# Altium PCB FT232_USB_8DAQ.PcbDoc (part 2 of 3)
Units mil, origin at the board's own origin, x right, y up, seen from the top; angles counter-clockwise.
Board outline 5020 x 4715 mil, 2 copper layers (Top Layer, Bottom Layer); 100 components, 0 nets, 361 pads, 148 vias.
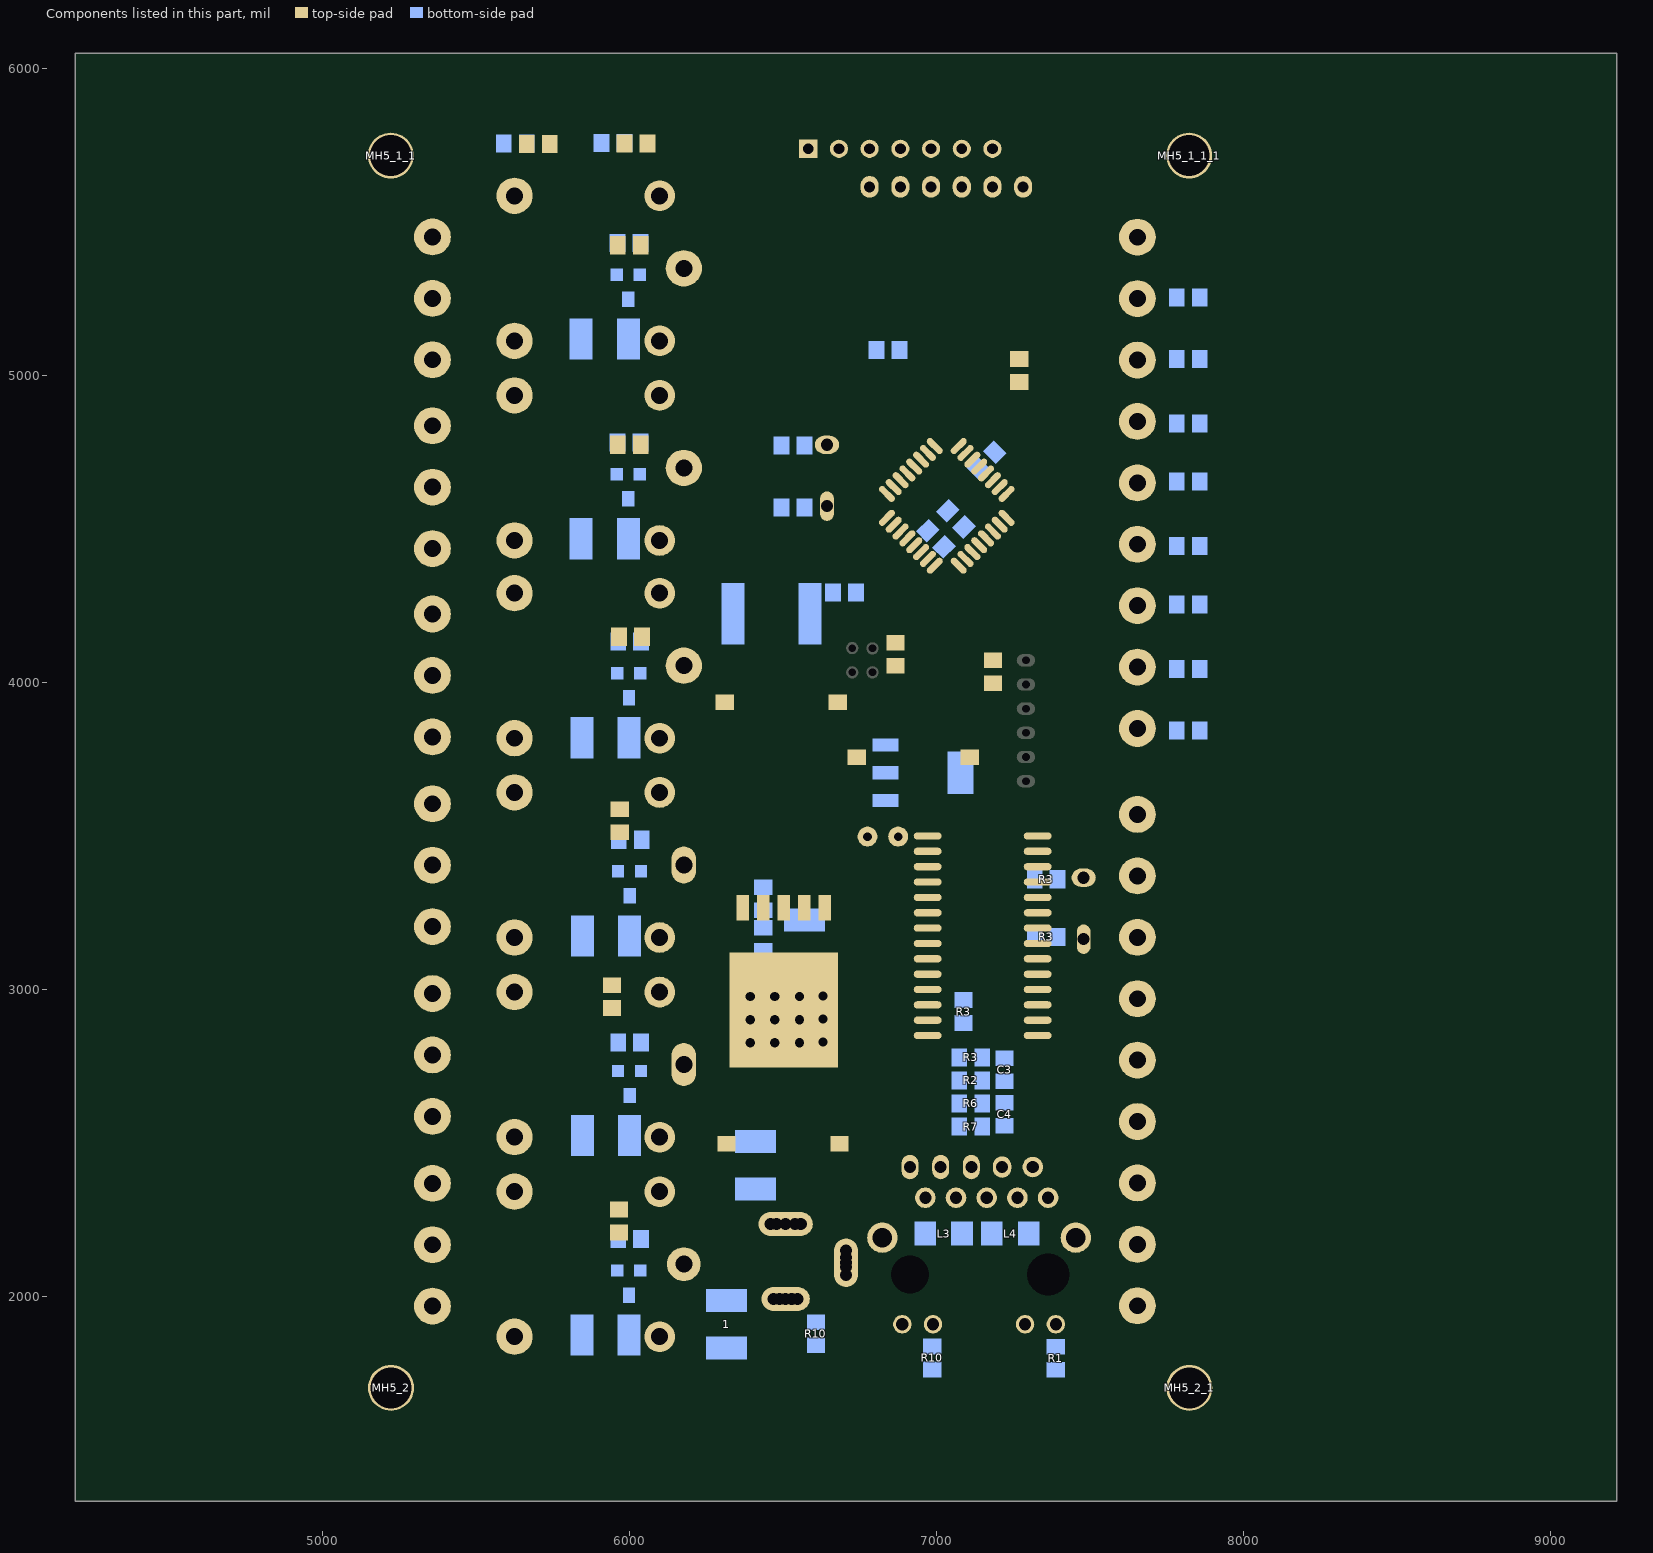
[diagram p2: the components of this part, seen from the top]

## Via types
v1: diameter 30, hole 19.68, Top Layer to Bottom Layer, tented both sides, 81 vias
v2: diameter 23.62, hole 11.81, Top Layer to Bottom Layer, 32 vias
v3: diameter 30, hole 19.68, Top Layer to Bottom Layer, 20 vias
v4: diameter 30, hole 19.68, Top Layer to Bottom Layer, tented top, 15 vias

## Nets (pads, with @x,y where several pads share a name; then routed paths per layer and width w, separated by ;. In a path a pad name is that pad's centre, name@x,y a point inside that pad or via, vN(x,y) a via of type N, cw(c..) or ccw(c..) an arc to the next point about the centre after c; other vN are vias at no path point) (continued)
copper on no net: | length 188775.6
  Top Layer w0.5: 6358.5,4665.5 6374,4665.5
  Top Layer w0.8: 7042.4,5392 7445.6,5392 ; 7043.2,5340 7432,5340 ; 7043.2,5392.8 7428.8,5392.8 ; 7044,5339.2 7430.4,5339.2 ; 7044,5393.6 7428,5393.6 ; 7044.8,5338.4 7429.6,5338.4 ; 7044.8,5394.4 7427.2,5394.4 ; 7046.4,5337.6 7428.8,5337.6 ; 7046.4,5395.2 7426.4,5395.2 ; 7047.2,5336.8 7428,5336.8 ; 7047.2,5396 7425.6,5396 ; 7048,5336 7427.2,5336 ; 7048,5396.8 7424.8,5396.8 ; 7049.6,5335.2 7425.6,5335.2 ; 7049.6,5397.6 7423.2,5397.6 ; 7050.4,5334.4 7424.8,5334.4 ; 7050.4,5398.4 7422.4,5398.4 ; 7052,5333.6 7423.2,5333.6 ; 7052,5399.2 7421.6,5399.2 ; 7052.8,5332.8 7422.4,5332.8 ; 7052.8,5400 7420,5400 ; 7054.4,5332 7420.8,5332 ; 7054.4,5400.8 7419.2,5400.8 ; 7055.2,5331.2 7420,5331.2 ; 7056,5401.6 7417.6,5401.6 ; 7056.8,5330.4 7418.4,5330.4 ; 7056.8,5402.4 7416.8,5402.4 ; 7058.4,5329.6 7417.6,5329.6 ; 7058.4,5403.2 7415.2,5403.2 ; 7060,5328.8 7416,5328.8 ; 7060,5404 7414.4,5404 ; 7060.8,5328 7414.4,5328 ; 7061.6,5404.8 7412.8,5404.8 ; 7062.4,5327.2 7412.8,5327.2 ; 7063.2,5405.6 7411.2,5405.6 ; 7064,5326.4 7412,5326.4 ; 7064.8,5406.4 7410.4,5406.4 ; 7065.6,5325.6 7410.4,5325.6 ; 7066.4,5407.2 7408.8,5407.2 ; 7067.2,5324.8 7408.8,5324.8 ; 7068,5408 7407.2,5408 ; 7068.8,5324 7407.2,5324 ; 7069.6,5408.8 7405.6,5408.8 ; 7071.2,5323.2 7406.4,5323.2 ; 7071.2,5409.6 7404,5409.6 ; 7072.8,5322.4 7406.4,5322.4 ; 7072.8,5410.4 7402.4,5410.4 ; 7074.4,5321.6 7405.6,5321.6 ; 7075.2,5411.2 7400.8,5411.2 ; 7076,5320.8 7405.6,5320.8 ; 7076.8,5412 7399.2,5412 ; 7078.4,5320 7404.8,5320 ; 7078.4,5412.8 7397.6,5412.8 ; 7080,5136.8 7094.4,5136.8 ; 7080,5137.6 7094.4,5137.6 ; 7080,5138.4 7094.4,5138.4 ; 7080,5139.2 7094.4,5139.2 ; 7080,5140 7094.4,5140 ; 7080,5140.8 7094.4,5140.8 ; 7080,5141.6 7094.4,5141.6 ; 7080,5142.4 7094.4,5142.4 ; 7080,5143.2 7094.4,5143.2 ; 7080,5144 7094.4,5144 ; 7080,5144.8 7094.4,5144.8 ; 7080,5145.6 7094.4,5145.6 ; 7080,5146.4 7094.4,5146.4 ; 7080,5147.2 7094.4,5147.2 ; 7080,5148 7094.4,5148 ; 7080,5148.8 7094.4,5148.8 ; 7080,5149.6 7094.4,5149.6 ; 7080,5150.4 7094.4,5150.4 ; 7080,5151.2 7094.4,5151.2 ; 7080,5152 7094.4,5152 ; 7080,5152.8 7094.4,5152.8 ; 7080,5153.6 7094.4,5153.6 ; 7080,5154.4 7094.4,5154.4 ; 7080,5155.2 7094.4,5155.2 ; 7080,5156 7094.4,5156 ; 7080,5156.8 7094.4,5156.8 ; 7080,5319.2 7404,5319.2 ; 7080.8,5130.4 7095.2,5130.4 ; 7080.8,5131.2 7095.2,5131.2 ; 7080.8,5132 7095.2,5132 ; 7080.8,5132.8 7095.2,5132.8 ; 7080.8,5133.6 7095.2,5133.6 ; 7080.8,5134.4 7095.2,5134.4 ; 7080.8,5135.2 7094.4,5135.2 ; 7080.8,5136 7094.4,5136 ; 7080.8,5157.6 7094.4,5157.6 ; 7080.8,5158.4 7094.4,5158.4 ; 7080.8,5159.2 7095.2,5159.2 ; 7080.8,5160 7095.2,5160 ; 7080.8,5160.8 7095.2,5160.8 ; 7080.8,5161.6 7095.2,5161.6 ; 7080.8,5162.4 7095.2,5162.4 ; 7080.8,5163.2 7095.2,5163.2 ; 7080.8,5164 7095.2,5164 ; 7080.8,5164.8 7095.2,5164.8 ; 7080.8,5413.6 7396,5413.6 ; 7081.6,5126.4 7096.8,5126.4 ; 7081.6,5127.2 7096,5127.2 ; 7081.6,5128 7096,5128 ; 7081.6,5128.8 7096,5128.8 ; 7081.6,5129.6 7096,5129.6 ; 7081.6,5165.6 7096,5165.6 ; 7081.6,5166.4 7096,5166.4 ; 7081.6,5167.2 7096,5167.2 ; 7081.6,5168 7096,5168 ; 7081.6,5168.8 7096,5168.8 ; 7081.6,5169.6 7096,5169.6 ; 7081.6,5170.4 7096,5170.4 ; 7082.4,5123.2 7097.6,5123.2 ; 7082.4,5124 7097.6,5124 ; 7082.4,5124.8 7096.8,5124.8 ; 7082.4,5125.6 7096.8,5125.6 ; 7082.4,5171.2 7096.8,5171.2 ; 7082.4,5172 7096.8,5172 ; 7082.4,5172.8 7096.8,5172.8 ; 7082.4,5173.6 7096.8,5173.6 ; 7082.4,5174.4 7096.8,5174.4 ; 7082.4,5175.2 7097.6,5175.2 ; 7082.4,5318.4 7404,5318.4 ; 7083.2,5120 7098.4,5120 ; 7083.2,5120.8 7098.4,5120.8 ; 7083.2,5121.6 7098.4,5121.6 ; 7083.2,5122.4 7097.6,5122.4 ; 7083.2,5176 7097.6,5176 ; 7083.2,5176.8 7097.6,5176.8 ; 7083.2,5177.6 7097.6,5177.6 ; 7083.2,5178.4 7097.6,5178.4 ; 7083.2,5179.2 7098.4,5179.2 ; 7083.2,5414.4 7394.4,5414.4 ; 7084,5117.6 7100,5117.6 ; 7084,5118.4 7099.2,5118.4 ; 7084,5119.2 7099.2,5119.2 ; 7084,5180 7098.4,5180 ; 7084,5180.8 7098.4,5180.8 ; 7084,5181.6 7098.4,5181.6 ; 7084,5182.4 7098.4,5182.4 ; 7084,5183.2 7099.2,5183.2 ; 7084.8,5115.2 7100.8,5115.2 ; 7084.8,5116 7100.8,5116 ; 7084.8,5116.8 7100,5116.8 ; 7084.8,5184 7099.2,5184 ; 7084.8,5184.8 7099.2,5184.8 ; 7084.8,5185.6 7099.2,5185.6 ; 7084.8,5186.4 7100,5186.4 ; 7084.8,5317.6 7403.2,5317.6 ; 7084.8,5415.2 7392,5415.2 ; 7085.6,5113.6 7102.4,5113.6 ; 7085.6,5114.4 7101.6,5114.4 ; 7085.6,5187.2 7100,5187.2 ; 7085.6,5188 7100,5188 ; 7085.6,5188.8 7100,5188.8 ; 7085.6,5189.6 7100.8,5189.6 ; 7086.4,5112 7103.2,5112 ; 7086.4,5112.8 7102.4,5112.8 ; 7086.4,5190.4 7100.8,5190.4 ; 7086.4,5191.2 7100.8,5191.2 ; 7086.4,5192 7100.8,5192 ; 7086.4,5192.8 7101.6,5192.8 ; 7086.4,5316.8 7384,5316.8 ; 7087.2,5110.4 7104.8,5110.4 ; 7087.2,5111.2 7104,5111.2 ; 7087.2,5193.6 7101.6,5193.6 ; 7087.2,5194.4 7101.6,5194.4 ; 7087.2,5195.2 7102.4,5195.2 ; 7087.2,5196 7102.4,5196 ; 7087.2,5416 7390.4,5416 ; 7088,5108.8 7106.4,5108.8 ; 7088,5109.6 7105.6,5109.6 ; 7088,5196.8 7102.4,5196.8 ; 7088,5197.6 7102.4,5197.6 ; 7088,5198.4 7103.2,5198.4 ; 7088,5199.2 7103.2,5199.2 ; 7088.8,5108 7107.2,5108 ; 7088.8,5200 7103.2,5200 ; 7088.8,5200.8 7104,5200.8 ; 7088.8,5201.6 7104,5201.6 ; 7088.8,5316 7381.6,5316 ; 7089.6,5106.4 7109.6,5106.4 ; 7089.6,5107.2 7108,5107.2 ; 7089.6,5202.4 7104,5202.4 ; 7089.6,5203.2 7104.8,5203.2 ; 7089.6,5204 7104.8,5204 ; 7089.6,5416.8 7388,5416.8 ; 7090.4,5105.6 7110.4,5105.6 ; 7090.4,5204.8 7104.8,5204.8 ; 7090.4,5205.6 7105.6,5205.6 ; 7090.4,5206.4 7105.6,5206.4 ; 7090.4,5207.2 7105.6,5207.2 ; 7091.2,5104 7112.8,5104 ; 7091.2,5104.8 7112,5104.8 ; 7091.2,5208 7106.4,5208 ; 7091.2,5208.8 7106.4,5208.8 ; 7091.2,5209.6 7106.4,5209.6 ; 7091.2,5315.2 7379.2,5315.2 ; 7092,5103.2 7115.2,5103.2 ; 7092,5210.4 7107.2,5210.4 ; 7092,5211.2 7107.2,5211.2 ; 7092,5212 7107.2,5212 ; 7092,5417.6 7386.4,5417.6 ; 7092.8,5102.4 7116.8,5102.4 ; 7092.8,5212.8 7108,5212.8 ; 7092.8,5213.6 7108,5213.6 ; 7092.8,5214.4 7108,5214.4 ; 7093.6,5101.6 7120,5101.6 ; 7093.6,5215.2 7108.8,5215.2 ; 7093.6,5216 7108.8,5216 ; 7093.6,5216.8 7108.8,5216.8 ; 7093.6,5314.4 7376.8,5314.4 ; 7094.4,5100 7182.4,5100 ; 7094.4,5100.8 7123.2,5100.8 ; 7094.4,5217.6 7109.6,5217.6 ; 7094.4,5218.4 7109.6,5218.4 ; 7094.4,5219.2 7109.6,5219.2 ; 7094.4,5418.4 7384,5418.4 ; 7095.2,5099.2 7180.8,5099.2 ; 7095.2,5220 7110.4,5220 ; 7095.2,5220.8 7110.4,5220.8 ; 7095.2,5221.6 7111.2,5221.6 ; 7096,5098.4 7179.2,5098.4 ; 7096,5222.4 7111.2,5222.4 ; 7096,5223.2 7111.2,5223.2 ; 7096,5313.6 7374.4,5313.6 ; 7096.8,5224 7112,5224 ; 7096.8,5224.8 7112,5224.8 ; 7096.8,5225.6 7112,5225.6 ; 7096.8,5419.2 7381.6,5419.2 ; 7097.6,5097.6 7176.8,5097.6 ; 7097.6,5226.4 7112.8,5226.4 ; 7097.6,5227.2 7112.8,5227.2 ; 7097.6,5228 7113.6,5228 ; 7098.4,5096.8 7175.2,5096.8 ; 7098.4,5228.8 7113.6,5228.8 ; 7098.4,5229.6 7113.6,5229.6 ; 7099.2,5096 7173.6,5096 ; 7099.2,5230.4 7114.4,5230.4 ; 7099.2,5231.2 7114.4,5231.2 ; 7099.2,5232 7115.2,5232 ; 7099.2,5312.8 7372,5312.8 ; 7099.2,5420 7380,5420 ; 7100,5095.2 7171.2,5095.2 ; 7100,5232.8 7115.2,5232.8 ; 7100,5233.6 7115.2,5233.6 ; 7100.8,5234.4 7116,5234.4 ; 7100.8,5235.2 7116,5235.2 ; 7100.8,5236 7116.8,5236 ; 7101.6,5094.4 7169.6,5094.4 ; 7101.6,5236.8 7116.8,5236.8 ; 7101.6,5237.6 7116.8,5237.6 ; 7101.6,5312 7368.8,5312 ; 7101.6,5420.8 7377.6,5420.8 ; 7102.4,5093.6 7167.2,5093.6 ; 7102.4,5238.4 7117.6,5238.4 ; 7102.4,5239.2 7117.6,5239.2 ; 7102.4,5240 7118.4,5240 ; 7103.2,5240.8 7118.4,5240.8 ; 7103.2,5241.6 7119.2,5241.6 ; 7104,5092.8 7164.8,5092.8 ; 7104,5242.4 7119.2,5242.4 ; 7104,5243.2 7119.2,5243.2 ; 7104,5244 7120,5244 ; 7104,5311.2 7366.4,5311.2 ; 7104.8,5092 7162.4,5092 ; 7104.8,5244.8 7120,5244.8 ; 7104.8,5245.6 7120.8,5245.6 ; 7104.8,5421.6 7375.2,5421.6 ; 7105.6,5246.4 7120.8,5246.4 ; 7105.6,5247.2 7121.6,5247.2 ; 7106.4,5091.2 7160,5091.2 ; 7106.4,5248 7121.6,5248 ; 7106.4,5248.8 7122.4,5248.8 ; 7106.4,5249.6 7122.4,5249.6 ; 7107.2,5250.4 7123.2,5250.4 ; 7107.2,5251.2 7123.2,5251.2 ; 7107.2,5310.4 7363.2,5310.4 ; 7107.2,5422.4 7372,5422.4 ; 7108,5090.4 7157.6,5090.4 ; 7108,5252 7123.2,5252 ; 7108,5252.8 7124,5252.8 ; 7108.8,5253.6 7124,5253.6 ; 7108.8,5254.4 7124.8,5254.4 ; 7109.6,5255.2 7124.8,5255.2 ; 7109.6,5256 7125.6,5256 ; 7109.6,5256.8 7125.6,5256.8 ; 7110.4,5089.6 7155.2,5089.6 ; 7110.4,5257.6 7126.4,5257.6 ; 7110.4,5258.4 7126.4,5258.4 ; 7110.4,5309.6 7360.8,5309.6 ; 7110.4,5423.2 7369.6,5423.2 ; 7111.2,5259.2 7127.2,5259.2 ; 7111.2,5260 7127.2,5260 ; 7112,5260.8 7128,5260.8 ; 7112,5261.6 7128,5261.6 ; 7112.8,5088.8 7152,5088.8 ; 7112.8,5262.4 7128.8,5262.4 ; 7112.8,5263.2 7128.8,5263.2 ; 7112.8,5424 7367.2,5424 ; 7113.6,5264 7129.6,5264 ; 7113.6,5264.8 7129.6,5264.8 ; 7113.6,5308.8 7357.6,5308.8 ; 7114.4,5265.6 7130.4,5265.6 ; 7114.4,5266.4 7130.4,5266.4 ; 7115.2,5088 7148,5088 ; 7115.2,5267.2 7131.2,5267.2 ; 7115.2,5268 7131.2,5268 ; 7116,5268.8 7132,5268.8 ; 7116,5269.6 7132,5269.6 ; 7116,5424.8 7364,5424.8 ; 7116.8,5270.4 7132.8,5270.4 ; 7116.8,5271.2 7132.8,5271.2 ; 7116.8,5308 7354.4,5308 ; 7117.6,5272 7133.6,5272 ; 7117.6,5272.8 7133.6,5272.8 ; 7118.4,5087.2 7144,5087.2 ; 7118.4,5273.6 7134.4,5273.6 ; 7118.4,5274.4 7134.4,5274.4 ; 7119.2,5275.2 7135.2,5275.2 ; 7119.2,5276 7135.2,5276 ; 7119.2,5425.6 7360.8,5425.6 ; 7120,5276.8 7136,5276.8 ; 7120,5277.6 7136,5277.6 ; 7120,5307.2 7350.4,5307.2 ; 7120.8,5278.4 7136.8,5278.4 ; 7120.8,5279.2 7136.8,5279.2 ; 7121.6,5280 7137.6,5280 ; 7121.6,5280.8 7137.6,5280.8 ; 7122.4,5281.6 7138.4,5281.6 ; 7122.4,5282.4 7138.4,5282.4 ; 7122.4,5426.4 7358.4,5426.4 ; 7123.2,5283.2 7139.2,5283.2 ; 7123.2,5284 7139.2,5284 ; 7123.2,5306.4 7347.2,5306.4 ; 7124,5284.8 7140,5284.8 ; 7124,5285.6 7140.8,5285.6 ; 7124.8,5086.4 7136.8,5086.4 ; 7124.8,5286.4 7140.8,5286.4 ; 7124.8,5287.2 7141.6,5287.2 ; 7125.6,5288 7141.6,5288 ; 7125.6,5288.8 7142.4,5288.8 ; 7125.6,5427.2 7355.2,5427.2 ; 7126.4,5289.6 7142.4,5289.6 ; 7126.4,5290.4 7143.2,5290.4 ; 7127.2,5291.2 7143.2,5291.2 ; 7127.2,5292 7144,5292 ; 7127.2,5305.6 7344,5305.6 ; 7128,5292.8 7144,5292.8 ; 7128.8,5293.6 7144.8,5293.6 ; 7128.8,5294.4 7145.6,5294.4 ; 7129.6,5295.2 7145.6,5295.2 ; 7129.6,5296 7146.4,5296 ; 7129.6,5428 7351.2,5428 ; 7130.4,5296.8 7146.4,5296.8 ; 7130.4,5297.6 7147.2,5297.6 ; 7131.2,5298.4 7147.2,5298.4 ; 7131.2,5299.2 7148,5299.2 ; 7131.2,5304.8 7340,5304.8 ; 7132,5300 7148.8,5300 ; 7132.8,5300.8 7148.8,5300.8 ; 7132.8,5301.6 7322.4,5301.6 ; 7132.8,5428.8 7348,5428.8 ; 7133.6,5302.4 7327.2,5302.4 ; 7133.6,5303.2 7331.2,5303.2 ; 7134.4,5304 7336,5304 ; 7136.8,5429.6 7344,5429.6 ; 7138.4,5100.8 7184,5100.8 ; 7140.8,5430.4 7340,5430.4 ; 7143.2,5101.6 7185.6,5101.6 ; 7145.6,5431.2 7336,5431.2 ; 7147.2,5102.4 7187.2,5102.4 ; 7149.6,5432 7331.2,5432 ; 7150.4,5103.2 7188.8,5103.2 ; 7153.6,5104 7189.6,5104 ; 7153.6,5300.8 7316.8,5300.8 ; 7155.2,5432.8 7326.4,5432.8 ; 7156,5104.8 7189.6,5104.8 ; 7158.4,5105.6 7188.8,5105.6 ; 7159.2,5300 7311.2,5300 ; 7160,5433.6 7321.6,5433.6 ; 7160.8,5106.4 7188.8,5106.4 ; 7162.4,5107.2 7188,5107.2 ; 7164.8,5108 7187.2,5108 ; 7165.6,5299.2 7304.8,5299.2 ; 7165.6,5434.4 7315.2,5434.4 ; 7167.2,5108.8 7187.2,5108.8 ; 7168.8,5109.6 7186.4,5109.6 ; 7170.4,5110.4 7186.4,5110.4 ; 7171.2,5435.2 7308.8,5435.2 ; 7172,5298.4 7298.4,5298.4 ; 7172.8,5111.2 7185.6,5111.2 ; 7174.4,5112 7185.6,5112 ; 7176,5112.8 7184.8,5112.8 ; 7177.6,5113.6 7184.8,5113.6 ; 7178.4,5436 7301.6,5436 ; 7179.2,5114.4 7184,5114.4 ; 7180,5297.6 7290.4,5297.6 ; 7180.8,5115.2 7184,5115.2 ; 7182.4,5116 7183.2,5116 ; 7185.6,5436.8 7293.6,5436.8 ; 7189.6,5296.8 7281.6,5296.8 ; 7194.4,5437.6 7284,5437.6 ; 7200.8,5296 7269.6,5296 ; 7206.4,5438.4 7270.4,5438.4 ; 7221.6,5295.2 7249.6,5295.2 ; 7230.4,5439.2 7250.4,5439.2 ; 7232,5440 7251.2,5440 ; 7232.8,5440.8 7252,5440.8 ; 7233.6,5441.6 7252.8,5441.6 ; 7234.4,5146.4 7279.2,5146.4 ; 7234.4,5147.2 7279.2,5147.2 ; 7234.4,5148 7279.2,5148 ; 7234.4,5148.8 7279.2,5148.8 ; 7234.4,5149.6 7279.2,5149.6 ; 7234.4,5150.4 7279.2,5150.4 ; 7234.4,5151.2 7279.2,5151.2 ; 7234.4,5152 7279.2,5152 ; 7234.4,5152.8 7279.2,5152.8 ; 7234.4,5153.6 7279.2,5153.6 ; 7234.4,5154.4 7279.2,5154.4 ; 7234.4,5155.2 7279.2,5155.2 ; 7234.4,5156 7279.2,5156 ; 7234.4,5156.8 7279.2,5156.8 ; 7234.4,5157.6 7279.2,5157.6 ; 7234.4,5158.4 7279.2,5158.4 ; 7234.4,5159.2 7279.2,5159.2 ; 7234.4,5160 7279.2,5160 ; 7234.4,5160.8 7279.2,5160.8 ; 7234.4,5161.6 7279.2,5161.6 ; 7234.4,5162.4 7279.2,5162.4 ; 7234.4,5163.2 7279.2,5163.2 ; 7234.4,5164 7279.2,5164 ; 7234.4,5164.8 7279.2,5164.8 ; 7234.4,5165.6 7277.6,5165.6 ; 7234.4,5166.4 7275.2,5166.4 ; 7234.4,5167.2 7273.6,5167.2 ; 7234.4,5168 7271.2,5168 ; 7234.4,5168.8 7270.4,5168.8 ; 7234.4,5169.6 7267.2,5169.6 ; 7234.4,5170.4 7264.8,5170.4 ; 7234.4,5171.2 7262.4,5171.2 ; 7234.4,5172 7260.8,5172 ; 7234.4,5172.8 7259.2,5172.8 ; 7234.4,5173.6 7256,5173.6 ; 7234.4,5174.4 7254.4,5174.4 ; 7234.4,5175.2 7252,5175.2 ; 7234.4,5176 7249.6,5176 ; 7234.4,5176.8 7248.8,5176.8 ; 7234.4,5177.6 7245.6,5177.6 ; 7234.4,5178.4 7243.2,5178.4 ; 7234.4,5179.2 7242.4,5179.2 ; 7234.4,5180 7239.2,5180 ; 7234.4,5180.8 7236.8,5180.8 ; 7234.4,5442.4 7253.6,5442.4 ; 7235.2,5443.2 7254.4,5443.2 ; 7236,5145.6 7279.2,5145.6 ; 7236,5186.4 7306.4,5186.4 ; 7236,5444 7255.2,5444 ; 7236,5444.8 7256,5444.8 ; 7236.8,5187.2 7307.2,5187.2 ; 7236.8,5445.6 7256.8,5445.6 ; 7237.6,5185.6 7304.8,5185.6 ; 7237.6,5188 7308.8,5188 ; 7237.6,5446.4 7257.6,5446.4 ; 7238.4,5144.8 7279.2,5144.8 ; 7238.4,5447.2 7258.4,5447.2 ; 7239.2,5188.8 7309.6,5188.8 ; 7239.2,5448 7259.2,5448 ; 7240,5144 7279.2,5144 ; 7240,5184.8 7304,5184.8 ; 7240,5448.8 7260,5448.8 ; 7240.8,5180 7242.4,5180 ; 7240.8,5180.8 7242.4,5180.8 ; 7240.8,5181.6 7243.2,5181.6 ; 7240.8,5182.4 7244,5182.4 ; 7240.8,5189.6 7311.2,5189.6 ; 7240.8,5449.6 7260.8,5449.6 ; 7241.6,5190.4 7312,5190.4 ; 7241.6,5450.4 7261.6,5450.4 ; 7242.4,5143.2 7279.2,5143.2 ; 7242.4,5183.2 7301.6,5183.2 ; 7242.4,5184 7302.4,5184 ; 7242.4,5451.2 7262.4,5451.2 ; 7243.2,5191.2 7313.6,5191.2 ; 7243.2,5452 7262.4,5452 ; 7244,5192 7315.2,5192 ; 7244,5452.8 7263.2,5452.8 ; 7244.8,5142.4 7279.2,5142.4 ; 7244.8,5453.6 7264,5453.6 ; 7245.6,5192.8 7316,5192.8 ; 7245.6,5454.4 7264.8,5454.4 ; 7245.6,5455.2 7265.6,5455.2 ; 7246.4,5141.6 7279.2,5141.6 ; 7246.4,5177.6 7248.8,5177.6 ; 7246.4,5178.4 7248.8,5178.4 ; 7246.4,5179.2 7248.8,5179.2 ; 7246.4,5180 7249.6,5180 ; 7246.4,5182.4 7300,5182.4 ; 7246.4,5193.6 7317.6,5193.6 ; 7246.4,5456 7266.4,5456 ; 7247.2,5456.8 7267.2,5456.8 ; 7248,5180.8 7297.6,5180.8 ; 7248,5194.4 7318.4,5194.4 ; 7248,5457.6 7268,5457.6 ; 7248.8,5140.8 7279.2,5140.8 ; 7248.8,5181.6 7298.4,5181.6 ; 7248.8,5195.2 7320,5195.2 ; 7248.8,5458.4 7268.8,5458.4 ; 7249.6,5459.2 7269.6,5459.2 ; 7250.4,5196 7320.8,5196 ; 7250.4,5460 7270.4,5460 ; 7251.2,5140 7279.2,5140 ; 7251.2,5460.8 7271.2,5460.8 ; 7252,5196.8 7322.4,5196.8 ; 7252,5461.6 7272,5461.6 ; 7252.8,5139.2 7279.2,5139.2 ; 7252.8,5175.2 7254.4,5175.2 ; 7252.8,5176 7254.4,5176 ; 7252.8,5176.8 7254.4,5176.8 ; 7252.8,5177.6 7254.4,5177.6 ; 7252.8,5178.4 7256,5178.4 ; 7252.8,5180 7296,5180 ; 7252.8,5197.6 7323.2,5197.6 ; 7252.8,5462.4 7272.8,5462.4 ; 7253.6,5463.2 7273.6,5463.2 ; 7254.4,5179.2 7295.2,5179.2 ; 7254.4,5198.4 7324.8,5198.4 ; 7254.4,5464 7274.4,5464 ; 7255.2,5138.4 7279.2,5138.4 ; 7255.2,5199.2 7326.4,5199.2 ; 7255.2,5464.8 7275.2,5464.8 ; 7256,5465.6 7276,5465.6 ; 7256.8,5200 7327.2,5200 ; 7256.8,5466.4 7276.8,5466.4 ; 7257.6,5137.6 7279.2,5137.6 ; 7257.6,5173.6 7259.2,5173.6 ; 7257.6,5174.4 7259.2,5174.4 ; 7257.6,5175.2 7259.2,5175.2 ; 7257.6,5176 7260.8,5176 ; 7257.6,5178.4 7293.6,5178.4 ; 7257.6,5200.8 7328.8,5200.8 ; 7257.6,5467.2 7277.6,5467.2 ; 7258.4,5468 7278.4,5468 ; 7259.2,5136.8 7279.2,5136.8 ; 7259.2,5176.8 7291.2,5176.8 ; 7259.2,5201.6 7329.6,5201.6 ; 7259.2,5468.8 7279.2,5468.8 ; 7260,5177.6 7292.8,5177.6 ; 7260,5202.4 7331.2,5202.4 ; 7260,5469.6 7280,5469.6 ; 7260.8,5470.4 7280.8,5470.4 ; 7261.6,5136 7279.2,5136 ; 7261.6,5203.2 7332,5203.2 ; 7261.6,5471.2 7281.6,5471.2 ; 7262.4,5472 7282.4,5472 ; 7263.2,5171.2 7264.8,5171.2 ; 7263.2,5172 7264.8,5172 ; 7263.2,5172.8 7264.8,5172.8 ; 7263.2,5173.6 7265.6,5173.6 ; 7263.2,5204 7333.6,5204 ; 7263.2,5472.8 7283.2,5472.8 ; 7264,5135.2 7279.2,5135.2 ; 7264,5174.4 7267.2,5174.4 ; 7264,5176 7290.4,5176 ; 7264,5204.8 7334.4,5204.8 ; 7264,5473.6 7284,5473.6 ; 7264.8,5474.4 7285.6,5474.4 ; 7265.6,5134.4 7279.2,5134.4 ; 7265.6,5175.2 7288.8,5175.2 ; 7265.6,5205.6 7334.4,5205.6 ; 7265.6,5475.2 7286.4,5475.2 ; 7266.4,5206.4 7332.8,5206.4 ; 7266.4,5476 7287.2,5476 ; 7267.2,5476.8 7288,5476.8 ; 7268,5133.6 7279.2,5133.6 ; 7268,5207.2 7330.4,5207.2 ; 7268,5477.6 7288.8,5477.6 ; 7268.8,5169.6 7270.4,5169.6 ; 7268.8,5170.4 7270.4,5170.4 ; 7268.8,5171.2 7271.2,5171.2 ; 7268.8,5172 7272,5172 ; 7268.8,5174.4 7287.2,5174.4 ; 7268.8,5208 7328,5208 ; 7268.8,5478.4 7289.6,5478.4 ; 7269.6,5479.2 7290.4,5479.2 ; 7270.4,5132.8 7279.2,5132.8 ; 7270.4,5172.8 7284.8,5172.8 ; 7270.4,5173.6 7286.4,5173.6 ; 7270.4,5208.8 7325.6,5208.8 ; 7270.4,5480 7291.2,5480 ; 7271.2,5209.6 7324,5209.6 ; 7271.2,5480.8 7292,5480.8 ; 7272,5132 7279.2,5132 ; 7272,5481.6 7292.8,5481.6 ; 7272.8,5210.4 7321.6,5210.4 ; 7272.8,5482.4 7293.6,5482.4 ; 7273.6,5483.2 7294.4,5483.2 ; 7274.4,5131.2 7279.2,5131.2 ; 7274.4,5211.2 7319.2,5211.2 ; 7274.4,5484 7295.2,5484 ; 7275.2,5172 7284,5172 ; 7275.2,5212 7316.8,5212 ; 7275.2,5484.8 7296.8,5484.8 ; 7276,5485.6 7297.6,5485.6 ; 7276.8,5130.4 7279.2,5130.4 ; 7276.8,5171.2 7282.4,5171.2 ; 7276.8,5212.8 7315.2,5212.8 ; 7276.8,5486.4 7298.4,5486.4 ; 7277.6,5213.6 7312.8,5213.6 ; 7277.6,5487.2 7299.2,5487.2 ; 7278.4,5488 7300,5488 ; 7279.2,5170.4 7281.6,5170.4 ; 7279.2,5214.4 7310.4,5214.4 ; 7279.2,5488.8 7300.8,5488.8 ; 7280,5215.2 7308.8,5215.2 ; 7280.8,5489.6 7301.6,5489.6 ; 7281.6,5216 7306.4,5216 ; 7281.6,5490.4 7302.4,5490.4 ; 7282.4,5216.8 7304,5216.8 ; 7282.4,5491.2 7304,5491.2 ; 7283.2,5492 7304.8,5492 ; 7284,5217.6 7301.6,5217.6 ; 7284,5492.8 7305.6,5492.8 ; 7284.8,5131.2 7286.4,5131.2 ; 7284.8,5132 7287.2,5132 ; 7284.8,5132.8 7288.8,5132.8 ; 7284.8,5133.6 7289.6,5133.6 ; 7284.8,5134.4 7291.2,5134.4 ; 7284.8,5135.2 7292,5135.2 ; 7284.8,5136 7293.6,5136 ; 7284.8,5136.8 7295.2,5136.8 ; 7284.8,5137.6 7296,5137.6 ; 7284.8,5138.4 7297.6,5138.4 ; 7284.8,5139.2 7298.4,5139.2 ; 7284.8,5140 7300,5140 ; 7284.8,5140.8 7300.8,5140.8 ; 7284.8,5141.6 7302.4,5141.6 ; 7284.8,5142.4 7303.2,5142.4 ; 7284.8,5143.2 7304.8,5143.2 ; 7284.8,5144 7306.4,5144 ; 7284.8,5144.8 7307.2,5144.8 ; 7284.8,5145.6 7308.8,5145.6 ; 7284.8,5146.4 7309.6,5146.4 ; 7284.8,5147.2 7311.2,5147.2 ; 7284.8,5148 7312,5148 ; 7284.8,5148.8 7313.6,5148.8 ; 7284.8,5149.6 7315.2,5149.6 ; 7284.8,5150.4 7316,5150.4 ; 7284.8,5151.2 7317.6,5151.2 ; 7284.8,5152 7318.4,5152 ; 7284.8,5152.8 7320,5152.8 ; 7284.8,5153.6 7320.8,5153.6 ; 7284.8,5154.4 7322.4,5154.4 ; 7284.8,5155.2 7324,5155.2 ; 7284.8,5156 7324.8,5156 ; 7284.8,5156.8 7326.4,5156.8 ; 7284.8,5157.6 7327.2,5157.6 ; 7284.8,5158.4 7328.8,5158.4 ; 7284.8,5159.2 7329.6,5159.2 ; 7284.8,5160 7331.2,5160 ; 7284.8,5160.8 7332,5160.8 ; 7284.8,5161.6 7333.6,5161.6 ; 7284.8,5162.4 7335.2,5162.4 ; 7284.8,5163.2 7335.2,5163.2 ; 7284.8,5164 7335.2,5164 ; 7284.8,5164.8 7335.2,5164.8 ; 7284.8,5165.6 7335.2,5165.6 ; 7284.8,5218.4 7300,5218.4 ; 7284.8,5493.6 7306.4,5493.6 ; 7285.6,5494.4 7307.2,5494.4 ; 7286.4,5166.4 7335.2,5166.4 ; 7286.4,5219.2 7297.6,5219.2 ; 7286.4,5495.2 7308,5495.2 ; 7287.2,5167.2 7335.2,5167.2 ; 7287.2,5496 7309.6,5496 ; 7288,5220 7295.2,5220 ; 7288,5496.8 7310.4,5496.8 ; 7288.8,5168 7335.2,5168 ; 7288.8,5220.8 7292.8,5220.8 ; 7289.6,5497.6 7311.2,5497.6 ; 7290.4,5168.8 7335.2,5168.8 ; 7290.4,5221.6 7291.2,5221.6 ; 7290.4,5498.4 7312,5498.4 ; 7291.2,5169.6 7335.2,5169.6 ; 7291.2,5499.2 7312.8,5499.2 ; 7292,5500 7313.6,5500 ; 7292.8,5170.4 7335.2,5170.4 ; 7292.8,5500.8 7315.2,5500.8 ; 7293.6,5171.2 7335.2,5171.2 ; 7293.6,5501.6 7316,5501.6 ; 7294.4,5502.4 7316.8,5502.4 ; 7295.2,5172 7335.2,5172 ; 7295.2,5503.2 7317.6,5503.2 ; 7296,5172.8 7335.2,5172.8 ; 7296.8,5504 7319.2,5504 ; 7297.6,5173.6 7335.2,5173.6 ; 7297.6,5504.8 7320,5504.8 ; 7298.4,5505.6 7320.8,5505.6 ; 7299.2,5174.4 7335.2,5174.4 ; 7299.2,5506.4 7321.6,5506.4 ; 7300,5175.2 7335.2,5175.2 ; 7300,5507.2 7323.2,5507.2 ; 7300.8,5508 7324,5508 ; 7301.6,5176 7335.2,5176 ; 7302.4,5176.8 7335.2,5176.8 ; 7302.4,5508.8 7324.8,5508.8 ; 7303.2,5509.6 7325.6,5509.6 ; 7304,5177.6 7335.2,5177.6 ; 7304,5510.4 7327.2,5510.4 ; 7304.8,5178.4 7335.2,5178.4 ; 7304.8,5511.2 7328,5511.2 ; 7305.6,5512 7328.8,5512 ; 7306.4,5179.2 7335.2,5179.2 ; 7307.2,5512.8 7330.4,5512.8 ; 7308,5180 7335.2,5180 ; 7308,5513.6 7331.2,5513.6 ; 7308.8,5180.8 7335.2,5180.8 ; 7308.8,5216.8 7332,5216.8 ; 7308.8,5217.6 7329.6,5217.6 ; 7308.8,5218.4 7327.2,5218.4 ; 7308.8,5219.2 7328,5219.2 ; 7308.8,5220 7328.8,5220 ; 7308.8,5220.8 7329.6,5220.8 ; 7308.8,5221.6 7330.4,5221.6 ; 7308.8,5222.4 7330.4,5222.4 ; 7308.8,5223.2 7331.2,5223.2 ; 7308.8,5224 7312,5224 ; 7308.8,5224.8 7310.4,5224.8 ; 7308.8,5514.4 7332,5514.4 ; 7309.6,5515.2 7333.6,5515.2 ; 7310.4,5181.6 7335.2,5181.6 ; 7311.2,5182.4 7335.2,5182.4 ; 7311.2,5216 7332,5216 ; 7311.2,5516 7334.4,5516 ; 7312,5516.8 7335.2,5516.8 ; 7312.8,5183.2 7335.2,5183.2 ; 7312.8,5215.2 7332,5215.2 ; 7312.8,5224 7332,5224 ; 7312.8,5517.6 7336.8,5517.6 ; 7313.6,5184 7335.2,5184 ; 7313.6,5224.8 7332.8,5224.8 ; 7313.6,5518.4 7337.6,5518.4 ; 7314.4,5225.6 7333.6,5225.6 ; 7315.2,5184.8 7335.2,5184.8 ; 7315.2,5214.4 7332,5214.4 ; 7315.2,5226.4 7334.4,5226.4 ; 7315.2,5519.2 7338.4,5519.2 ; 7316,5185.6 7335.2,5185.6 ; 7316,5227.2 7335.2,5227.2 ; 7316,5520 7340,5520 ; 7316.8,5228 7336,5228 ; 7316.8,5520.8 7340.8,5520.8 ; 7317.6,5186.4 7335.2,5186.4 ; 7317.6,5213.6 7332,5213.6 ; 7317.6,5228.8 7336,5228.8 ; 7317.6,5229.6 7336.8,5229.6 ; 7317.6,5521.6 7341.6,5521.6 ; 7318.4,5230.4 7337.6,5230.4 ; 7319.2,5187.2 7335.2,5187.2 ; 7319.2,5231.2 7338.4,5231.2 ; 7319.2,5522.4 7343.2,5522.4 ; 7320,5188 7335.2,5188 ; 7320,5212.8 7332,5212.8 ; 7320,5232 7339.2,5232 ; 7320,5523.2 7344,5523.2 ; 7320.8,5232.8 7340,5232.8 ; 7320.8,5524 7345.6,5524 ; 7321.6,5188.8 7335.2,5188.8 ; 7321.6,5212 7332,5212 ; 7321.6,5233.6 7340.8,5233.6 ; 7322.4,5189.6 7335.2,5189.6 ; 7322.4,5234.4 7340.8,5234.4 ; 7322.4,5524.8 7346.4,5524.8 ; 7323.2,5235.2 7341.6,5235.2 ; 7323.2,5525.6 7348,5525.6 ; 7324,5190.4 7335.2,5190.4 ; 7324,5211.2 7332,5211.2 ; 7324,5236 7342.4,5236 ; 7324,5236.8 7343.2,5236.8 ; 7324,5526.4 7348.8,5526.4 ; 7324.8,5191.2 7335.2,5191.2 ; 7324.8,5237.6 7344,5237.6 ; 7325.6,5238.4 7344.8,5238.4 ; 7325.6,5527.2 7350.4,5527.2 ; 7326.4,5192 7335.2,5192 ; 7326.4,5210.4 7332,5210.4 ; 7326.4,5239.2 7345.6,5239.2 ; 7326.4,5528 7351.2,5528 ; 7327.2,5240 7345.6,5240 ; 7327.2,5528.8 7352.8,5528.8 ; 7328,5192.8 7335.2,5192.8 ; 7328,5209.6 7332,5209.6 ; 7328,5240.8 7346.4,5240.8 ; 7328.8,5193.6 7335.2,5193.6 ; 7328.8,5241.6 7347.2,5241.6 ; 7328.8,5242.4 7348,5242.4 ; 7328.8,5529.6 7353.6,5529.6 ; 7329.6,5243.2 7348.8,5243.2 ; 7329.6,5530.4 7355.2,5530.4 ; 7330.4,5194.4 7335.2,5194.4 ; 7330.4,5208.8 7332,5208.8 ; 7330.4,5244 7348.8,5244 ; 7330.4,5531.2 7356,5531.2 ; 7331.2,5195.2 7335.2,5195.2 ; 7331.2,5244.8 7349.6,5244.8 ; 7332,5245.6 7350.4,5245.6 ; 7332,5532 7357.6,5532 ; 7332.8,5196 7335.2,5196 ; 7332.8,5246.4 7351.2,5246.4 ; 7332.8,5247.2 7352,5247.2 ; 7332.8,5532.8 7358.4,5532.8 ; 7333.6,5196.8 7335.2,5196.8 ; 7333.6,5248 7352.8,5248 ; 7334.4,5248.8 7352.8,5248.8 ; 7334.4,5533.6 7360,5533.6 ; 7335.2,5249.6 7353.6,5249.6 ; 7335.2,5534.4 7361.6,5534.4 ; 7336,5250.4 7354.4,5250.4 ; 7336,5535.2 7362.4,5535.2 ; 7336.8,5251.2 7355.2,5251.2 ; 7336.8,5252 7356,5252 ; 7337.6,5252.8 7356,5252.8 ; 7337.6,5536 7364,5536 ; 7338.4,5253.6 7356.8,5253.6 ; 7338.4,5536.8 7365.6,5536.8 ; 7339.2,5254.4 7357.6,5254.4 ; 7340,5255.2 7358.4,5255.2 ; 7340,5537.6 7366.4,5537.6 ; 7340.8,5256 7359.2,5256 ; 7340.8,5256.8 7359.2,5256.8 ; 7340.8,5538.4 7368,5538.4 ; 7341.6,5257.6 7360,5257.6 ; 7342.4,5258.4 7360.8,5258.4 ; 7342.4,5539.2 7369.6,5539.2 ; 7343.2,5259.2 7361.6,5259.2 ; 7343.2,5540 7371.2,5540 ; 7344,5260 7362.4,5260 ; 7344,5260.8 7362.4,5260.8 ; 7344.8,5261.6 7363.2,5261.6 ; 7344.8,5540.8 7372,5540.8 ; 7345.6,5262.4 7364,5262.4 ; 7345.6,5541.6 7373.6,5541.6 ; 7346.4,5263.2 7364.8,5263.2 ; 7347.2,5264 7364.8,5264 ; 7347.2,5264.8 7365.6,5264.8 ; 7347.2,5542.4 7375.2,5542.4 ; 7348,5265.6 7366.4,5265.6 ; 7348,5543.2 7376.8,5543.2 ; 7348.8,5266.4 7367.2,5266.4 ; 7349.6,5267.2 7367.2,5267.2 ; 7349.6,5268 7368,5268 ; 7349.6,5544 7378.4,5544 ; 7350.4,5268.8 7368.8,5268.8 ; 7351.2,5269.6 7369.6,5269.6 ; 7351.2,5544.8 7380,5544.8 ; 7352,5270.4 7370.4,5270.4 ; 7352,5545.6 7381.6,5545.6 ; 7352.8,5271.2 7370.4,5271.2 ; 7352.8,5272 7371.2,5272 ; 7353.6,5272.8 7372,5272.8 ; 7353.6,5546.4 7383.2,5546.4 ; 7354.4,5273.6 7372,5273.6 ; 7354.4,5547.2 7384.8,5547.2 ; 7355.2,5274.4 7372.8,5274.4 ; 7355.2,5275.2 7373.6,5275.2 ; 7356,5276 7374.4,5276 ; 7356,5548 7386.4,5548 ; 7356.8,5276.8 7374.4,5276.8 ; 7357.6,5277.6 7375.2,5277.6 ; 7357.6,5548.8 7388,5548.8 ; 7358.4,5278.4 7376,5278.4 ; 7358.4,5279.2 7376.8,5279.2 ; 7358.4,5549.6 7389.6,5549.6 ; 7359.2,5280 7376.8,5280 ; 7360,5280.8 7377.6,5280.8 ; 7360,5550.4 7392,5550.4 ; 7360.8,5281.6 7378.4,5281.6 ; 7360.8,5282.4 7379.2,5282.4 ; 7361.6,5283.2 7379.2,5283.2 ; 7361.6,5551.2 7393.6,5551.2 ; 7362.4,5284 7380,5284 ; 7362.4,5284.8 7380.8,5284.8 ; 7363.2,5285.6 7381.6,5285.6 ; 7363.2,5552 7396,5552 ; 7364,5286.4 7381.6,5286.4 ; 7364,5552.8 7397.6,5552.8 ; 7364.8,5287.2 7382.4,5287.2 ; 7364.8,5288 7383.2,5288 ; 7365.6,5288.8 7383.2,5288.8 ; 7365.6,5553.6 7400,5553.6 ; 7366.4,5289.6 7384,5289.6 ; 7367.2,5290.4 7384.8,5290.4 ; 7367.2,5291.2 7385.6,5291.2 ; 7367.2,5554.4 7402.4,5554.4 ; 7368,5292 7385.6,5292 ; 7368.8,5292.8 7386.4,5292.8 ; 7368.8,5555.2 7404.8,5555.2 ; 7369.6,5293.6 7387.2,5293.6 ; 7369.6,5294.4 7387.2,5294.4 ; 7370.4,5295.2 7388,5295.2 ; 7370.4,5556 7407.2,5556 ; 7371.2,5296 7388.8,5296 ; 7371.2,5296.8 7388.8,5296.8 ; 7372,5297.6 7389.6,5297.6 ; 7372,5556.8 7409.6,5556.8 ; 7372.8,5298.4 7390.4,5298.4 ; 7373.6,5299.2 7391.2,5299.2 ; 7373.6,5300 7391.2,5300 ; 7373.6,5557.6 7412.8,5557.6 ; 7374.4,5300.8 7392,5300.8 ; 7375.2,5301.6 7392.8,5301.6 ; 7375.2,5302.4 7392.8,5302.4 ; 7375.2,5558.4 7416.8,5558.4 ; 7376,5303.2 7393.6,5303.2 ; 7376.8,5304 7394.4,5304 ; 7376.8,5559.2 7421.6,5559.2 ; 7377.6,5304.8 7394.4,5304.8 ; 7377.6,5305.6 7395.2,5305.6 ; 7378.4,5306.4 7396,5306.4 ; 7378.4,5560 7466.4,5560 ; 7379.2,5307.2 7396,5307.2 ; 7379.2,5308 7396.8,5308 ; 7380,5308.8 7397.6,5308.8 ; 7380,5560.8 7465.6,5560.8 ; 7380.8,5309.6 7397.6,5309.6 ; 7380.8,5310.4 7398.4,5310.4 ; 7381.6,5311.2 7399.2,5311.2 ; 7381.6,5561.6 7464.8,5561.6 ; 7382.4,5312 7399.2,5312 ; 7382.4,5312.8 7400,5312.8 ; 7383.2,5313.6 7400.8,5313.6 ; 7383.2,5562.4 7464,5562.4 ; 7384,5314.4 7400.8,5314.4 ; 7384,5315.2 7401.6,5315.2 ; 7384.8,5316 7402.4,5316 ; 7385.6,5316.8 7402.4,5316.8 ; 7385.6,5563.2 7463.2,5563.2 ; 7387.2,5564 7461.6,5564 ; 7388.8,5564.8 7460.8,5564.8 ; 7391.2,5565.6 7460,5565.6 ; 7393.6,5566.4 7458.4,5566.4 ; 7395.2,5567.2 7457.6,5567.2 ; 7397.6,5568 7456,5568 ; 7400,5568.8 7454.4,5568.8 ; 7402.4,5569.6 7452.8,5569.6 ; 7405.6,5570.4 7451.2,5570.4 ; 7406.4,5176 7430.4,5176 ; 7406.4,5176.8 7430.4,5176.8 ; 7406.4,5177.6 7430.4,5177.6 ; 7406.4,5178.4 7430.4,5178.4 ; 7406.4,5179.2 7430.4,5179.2 ; 7406.4,5180 7430.4,5180 ; 7406.4,5180.8 7430.4,5180.8 ; 7406.4,5181.6 7430.4,5181.6 ; 7406.4,5182.4 7430.4,5182.4 ; 7406.4,5183.2 7430.4,5183.2 ; 7406.4,5184 7430.4,5184 ; 7406.4,5184.8 7430.4,5184.8 ; 7406.4,5185.6 7430.4,5185.6 ; 7406.4,5186.4 7430.4,5186.4 ; 7406.4,5187.2 7430.4,5187.2 ; 7406.4,5188 7430.4,5188 ; 7406.4,5188.8 7430.4,5188.8 ; 7406.4,5189.6 7430.4,5189.6 ; 7406.4,5190.4 7430.4,5190.4 ; 7406.4,5191.2 7430.4,5191.2 ; 7406.4,5192 7430.4,5192 ; 7406.4,5192.8 7430.4,5192.8 ; 7406.4,5193.6 7430.4,5193.6 ; 7406.4,5194.4 7430.4,5194.4 ; 7406.4,5195.2 7430.4,5195.2 ; 7406.4,5196 7430.4,5196 ; 7406.4,5196.8 7430.4,5196.8 ; 7406.4,5197.6 7430.4,5197.6 ; 7406.4,5198.4 7430.4,5198.4 ; 7406.4,5199.2 7430.4,5199.2 ; 7406.4,5200 7430.4,5200 ; 7406.4,5200.8 7430.4,5200.8 ; 7406.4,5201.6 7430.4,5201.6 ; 7406.4,5202.4 7430.4,5202.4 ; 7406.4,5203.2 7430.4,5203.2 ; 7406.4,5204 7430.4,5204 ; 7406.4,5204.8 7430.4,5204.8 ; 7406.4,5205.6 7430.4,5205.6 ; 7406.4,5206.4 7430.4,5206.4 ; 7406.4,5207.2 7430.4,5207.2 ; 7406.4,5208 7430.4,5208 ; 7406.4,5208.8 7430.4,5208.8 ; 7406.4,5209.6 7430.4,5209.6 ; 7406.4,5210.4 7430.4,5210.4 ; 7406.4,5211.2 7430.4,5211.2 ; 7406.4,5212 7430.4,5212 ; 7406.4,5212.8 7430.4,5212.8 ; 7406.4,5213.6 7430.4,5213.6 ; 7406.4,5214.4 7430.4,5214.4 ; 7406.4,5215.2 7430.4,5215.2 ; 7406.4,5216 7430.4,5216 ; 7406.4,5216.8 7430.4,5216.8 ; 7406.4,5217.6 7430.4,5217.6 ; 7406.4,5218.4 7430.4,5218.4 ; 7406.4,5219.2 7430.4,5219.2 ; 7406.4,5220 7430.4,5220 ; 7406.4,5220.8 7430.4,5220.8 ; 7406.4,5221.6 7430.4,5221.6 ; 7406.4,5222.4 7430.4,5222.4 ; 7406.4,5223.2 7430.4,5223.2 ; 7406.4,5224 7430.4,5224 ; 7406.4,5224.8 7430.4,5224.8 ; 7406.4,5225.6 7430.4,5225.6 ; 7406.4,5226.4 7430.4,5226.4 ; 7406.4,5227.2 7430.4,5227.2 ; 7406.4,5228 7430.4,5228 ; 7406.4,5228.8 7430.4,5228.8 ; 7406.4,5229.6 7430.4,5229.6 ; 7406.4,5230.4 7430.4,5230.4 ; 7406.4,5231.2 7430.4,5231.2 ; 7406.4,5232 7430.4,5232 ; 7406.4,5232.8 7430.4,5232.8 ; 7406.4,5233.6 7430.4,5233.6 ; 7406.4,5234.4 7430.4,5234.4 ; 7406.4,5235.2 7430.4,5235.2 ; 7406.4,5236 7430.4,5236 ; 7406.4,5236.8 7430.4,5236.8 ; 7406.4,5237.6 7430.4,5237.6 ; 7406.4,5238.4 7430.4,5238.4 ; 7406.4,5239.2 7430.4,5239.2 ; 7406.4,5240 7430.4,5240 ; 7406.4,5240.8 7430.4,5240.8 ; 7406.4,5241.6 7430.4,5241.6 ; 7406.4,5242.4 7430.4,5242.4 ; 7406.4,5243.2 7430.4,5243.2 ; 7406.4,5244 7430.4,5244 ; 7406.4,5244.8 7430.4,5244.8 ; 7406.4,5245.6 7430.4,5245.6 ; 7406.4,5246.4 7430.4,5246.4 ; 7406.4,5247.2 7430.4,5247.2 ; 7406.4,5248 7430.4,5248 ; 7406.4,5248.8 7430.4,5248.8 ; 7406.4,5249.6 7430.4,5249.6 ; 7406.4,5250.4 7430.4,5250.4 ; 7406.4,5251.2 7430.4,5251.2 ; 7406.4,5252 7430.4,5252 ; 7406.4,5252.8 7430.4,5252.8 ; 7406.4,5253.6 7430.4,5253.6 ; 7406.4,5254.4 7430.4,5254.4 ; 7406.4,5255.2 7430.4,5255.2 ; 7406.4,5256 7430.4,5256 ; 7406.4,5256.8 7430.4,5256.8 ; 7406.4,5257.6 7430.4,5257.6 ; 7406.4,5258.4 7430.4,5258.4 ; 7406.4,5259.2 7430.4,5259.2 ; 7406.4,5260 7430.4,5260 ; 7406.4,5260.8 7430.4,5260.8 ; 7406.4,5261.6 7430.4,5261.6 ; 7406.4,5262.4 7430.4,5262.4 ; 7406.4,5263.2 7430.4,5263.2 ; 7406.4,5264 7430.4,5264 ; 7406.4,5264.8 7430.4,5264.8 ; 7406.4,5265.6 7430.4,5265.6 ; 7406.4,5266.4 7430.4,5266.4 ; 7406.4,5267.2 7430.4,5267.2 ; 7406.4,5268 7430.4,5268 ; 7406.4,5268.8 7430.4,5268.8 ; 7406.4,5269.6 7430.4,5269.6 ; 7406.4,5270.4 7430.4,5270.4 ; 7406.4,5271.2 7430.4,5271.2 ; 7406.4,5272 7430.4,5272 ; 7406.4,5272.8 7430.4,5272.8 ; 7406.4,5273.6 7430.4,5273.6 ; 7406.4,5274.4 7430.4,5274.4 ; 7406.4,5275.2 7430.4,5275.2 ; 7406.4,5276 7430.4,5276 ; 7406.4,5276.8 7430.4,5276.8 ; 7406.4,5277.6 7430.4,5277.6 ; 7406.4,5278.4 7430.4,5278.4 ; 7406.4,5279.2 7430.4,5279.2 ; 7406.4,5280 7430.4,5280 ; 7406.4,5280.8 7430.4,5280.8 ; 7406.4,5281.6 7430.4,5281.6 ; 7406.4,5282.4 7430.4,5282.4 ; 7406.4,5283.2 7430.4,5283.2 ; 7406.4,5284 7430.4,5284 ; 7406.4,5284.8 7430.4,5284.8 ; 7406.4,5285.6 7430.4,5285.6 ; 7406.4,5286.4 7430.4,5286.4 ; 7406.4,5287.2 7430.4,5287.2 ; 7406.4,5288 7430.4,5288 ; 7406.4,5288.8 7430.4,5288.8 ; 7406.4,5289.6 7430.4,5289.6 ; 7406.4,5290.4 7430.4,5290.4 ; 7406.4,5291.2 7430.4,5291.2 ; 7408.8,5571.2 7448.8,5571.2 ; 7412,5572 7446.4,5572 ; 7416,5572.8 7443.2,5572.8 ; 7422.4,5573.6 7438.4,5573.6 ; 7429.6,5392.8 7445.6,5392.8 ; 7430.4,5393.6 7446.4,5393.6 ; 7430.4,5394.4 7446.4,5394.4 ; 7431.2,5395.2 7447.2,5395.2 ; 7431.2,5396 7447.2,5396 ; 7432,5396.8 7448,5396.8 ; 7432,5397.6 7448,5397.6 ; 7432.8,5398.4 7448.8,5398.4 ; 7432.8,5399.2 7448.8,5399.2 ; 7433.6,5400 7449.6,5400 ; 7433.6,5400.8 7449.6,5400.8 ; 7434.4,5401.6 7450.4,5401.6 ; 7434.4,5402.4 7450.4,5402.4 ; 7435.2,5403.2 7451.2,5403.2 ; 7435.2,5404 7451.2,5404 ; 7436,5404.8 7451.2,5404.8 ; 7436,5405.6 7452,5405.6 ; 7436.8,5406.4 7452,5406.4 ; 7436.8,5407.2 7452.8,5407.2 ; 7437.6,5408 7452.8,5408 ; 7437.6,5408.8 7453.6,5408.8 ; 7438.4,5409.6 7453.6,5409.6 ; 7438.4,5410.4 7454.4,5410.4 ; 7438.4,5411.2 7454.4,5411.2 ; 7438.4,5559.2 7467.2,5559.2 ; 7439.2,5412 7454.4,5412 ; 7439.2,5412.8 7455.2,5412.8 ; 7440,5413.6 7455.2,5413.6 ; 7440,5414.4 7456,5414.4 ; 7440.8,5415.2 7456,5415.2 ; 7440.8,5416 7456.8,5416 ; 7441.6,5416.8 7456.8,5416.8 ; 7441.6,5417.6 7456.8,5417.6 ; 7441.6,5418.4 7457.6,5418.4 ; 7441.6,5558.4 7468,5558.4 ; 7442.4,5419.2 7457.6,5419.2 ; 7442.4,5420 7458.4,5420 ; 7443.2,5420.8 7458.4,5420.8 ; 7443.2,5421.6 7459.2,5421.6 ; 7444,5422.4 7459.2,5422.4 ; 7444,5423.2 7459.2,5423.2 ; 7444,5424 7460,5424 ; 7444,5557.6 7468,5557.6 ; 7444.8,5424.8 7460,5424.8 ; 7444.8,5425.6 7460.8,5425.6 ; 7445.6,5426.4 7460.8,5426.4 ; 7445.6,5427.2 7460.8,5427.2 ; 7445.6,5428 7461.6,5428 ; 7446.4,5428.8 7461.6,5428.8 ; 7446.4,5429.6 7461.6,5429.6 ; 7446.4,5556.8 7468.8,5556.8 ; 7447.2,5430.4 7462.4,5430.4 ; 7447.2,5431.2 7462.4,5431.2 ; 7447.2,5432 7463.2,5432 ; 7448,5432.8 7463.2,5432.8 ; 7448,5433.6 7463.2,5433.6 ; 7448,5556 7469.6,5556 ; 7448.8,5434.4 7464,5434.4 ; 7448.8,5435.2 7464,5435.2 ; 7448.8,5436 7464,5436 ; 7449.6,5436.8 7464.8,5436.8 ; 7449.6,5437.6 7464.8,5437.6 ; 7449.6,5555.2 7470.4,5555.2 ; 7450.4,5438.4 7465.6,5438.4 ; 7450.4,5439.2 7465.6,5439.2 ; 7450.4,5440 7465.6,5440 ; 7450.4,5554.4 7470.4,5554.4 ; 7451.2,5176 7476,5176 ; 7451.2,5176.8 7476,5176.8 ; 7451.2,5177.6 7476,5177.6 ; 7451.2,5178.4 7476,5178.4 ; 7451.2,5179.2 7476,5179.2 ; 7451.2,5180 7476,5180 ; 7451.2,5180.8 7476,5180.8 ; 7451.2,5181.6 7476,5181.6 ; 7451.2,5182.4 7476,5182.4 ; 7451.2,5183.2 7476,5183.2 ; 7451.2,5184 7476,5184 ; 7451.2,5184.8 7476,5184.8 ; 7451.2,5185.6 7476,5185.6 ; 7451.2,5186.4 7476,5186.4 ; 7451.2,5187.2 7476,5187.2 ; 7451.2,5188 7476,5188 ; 7451.2,5188.8 7476,5188.8 ; 7451.2,5189.6 7476,5189.6 ; 7451.2,5190.4 7476,5190.4 ; 7451.2,5191.2 7476,5191.2 ; 7451.2,5192 7476,5192 ; 7451.2,5192.8 7476,5192.8 ; 7451.2,5193.6 7476,5193.6 ; 7451.2,5194.4 7476,5194.4 ; 7451.2,5195.2 7476,5195.2 ; 7451.2,5196 7476,5196 ; 7451.2,5196.8 7476,5196.8 ; 7451.2,5197.6 7476,5197.6 ; 7451.2,5198.4 7476,5198.4 ; 7451.2,5199.2 7476,5199.2 ; 7451.2,5200 7476,5200 ; 7451.2,5200.8 7476,5200.8 ; 7451.2,5201.6 7476,5201.6 ; 7451.2,5202.4 7476,5202.4 ; 7451.2,5203.2 7476,5203.2 ; 7451.2,5204 7476,5204 ; 7451.2,5204.8 7476,5204.8 ; 7451.2,5205.6 7476,5205.6 ; 7451.2,5206.4 7476,5206.4 ; 7451.2,5207.2 7476,5207.2 ; 7451.2,5208 7476,5208 ; 7451.2,5208.8 7476,5208.8 ; 7451.2,5209.6 7476,5209.6 ; 7451.2,5210.4 7476,5210.4 ; 7451.2,5211.2 7476,5211.2 ; 7451.2,5212 7476,5212 ; 7451.2,5212.8 7476,5212.8 ; 7451.2,5213.6 7476,5213.6 ; 7451.2,5214.4 7476,5214.4 ; 7451.2,5215.2 7476,5215.2 ; 7451.2,5216 7476,5216 ; 7451.2,5216.8 7476,5216.8 ; 7451.2,5217.6 7476,5217.6 ; 7451.2,5218.4 7476,5218.4 ; 7451.2,5219.2 7507.2,5219.2 ; 7451.2,5220 7513.6,5220 ; 7451.2,5220.8 7516.8,5220.8 ; 7451.2,5221.6 7519.2,5221.6 ; 7451.2,5222.4 7520.8,5222.4 ; 7451.2,5223.2 7522.4,5223.2 ; 7451.2,5224 7524,5224 ; 7451.2,5224.8 7525.6,5224.8 ; 7451.2,5225.6 7526.4,5225.6 ; 7451.2,5226.4 7528,5226.4 ; 7451.2,5227.2 7528.8,5227.2 ; 7451.2,5228 7529.6,5228 ; 7451.2,5228.8 7530.4,5228.8 ; 7451.2,5229.6 7531.2,5229.6 ; 7451.2,5230.4 7532,5230.4 ; 7451.2,5231.2 7532.8,5231.2 ; 7451.2,5232 7533.6,5232 ; 7451.2,5232.8 7533.6,5232.8 ; 7451.2,5233.6 7534.4,5233.6 ; 7451.2,5234.4 7535.2,5234.4 ; 7451.2,5235.2 7535.2,5235.2 ; 7451.2,5236 7536,5236 ; 7451.2,5236.8 7536,5236.8 ; 7451.2,5237.6 7536.8,5237.6 ; 7451.2,5238.4 7536.8,5238.4 ; 7451.2,5239.2 7476,5239.2 ; 7451.2,5240 7476,5240 ; 7451.2,5240.8 7476,5240.8 ; 7451.2,5241.6 7476,5241.6 ; 7451.2,5242.4 7476,5242.4 ; 7451.2,5243.2 7476,5243.2 ; 7451.2,5244 7476,5244 ; 7451.2,5244.8 7476,5244.8 ; 7451.2,5245.6 7476,5245.6 ; 7451.2,5246.4 7476,5246.4 ; 7451.2,5247.2 7476,5247.2 ; 7451.2,5248 7476,5248 ; 7451.2,5248.8 7476,5248.8 ; 7451.2,5249.6 7476,5249.6 ; 7451.2,5250.4 7476,5250.4 ; 7451.2,5251.2 7476,5251.2 ; 7451.2,5252 7476,5252 ; 7451.2,5252.8 7476,5252.8 ; 7451.2,5253.6 7476,5253.6 ; 7451.2,5254.4 7476,5254.4 ; 7451.2,5255.2 7476,5255.2 ; 7451.2,5256 7476,5256 ; 7451.2,5256.8 7476,5256.8 ; 7451.2,5257.6 7476,5257.6 ; 7451.2,5258.4 7476,5258.4 ; 7451.2,5259.2 7476,5259.2 ; 7451.2,5260 7476,5260 ; 7451.2,5260.8 7476,5260.8 ; 7451.2,5261.6 7476,5261.6 ; 7451.2,5262.4 7476,5262.4 ; 7451.2,5263.2 7476,5263.2 ; 7451.2,5264 7476,5264 ; 7451.2,5264.8 7476,5264.8 ; 7451.2,5265.6 7476,5265.6 ; 7451.2,5266.4 7476,5266.4 ; 7451.2,5267.2 7476,5267.2 ; 7451.2,5268 7476,5268 ; 7451.2,5268.8 7476,5268.8 ; 7451.2,5269.6 7476,5269.6 ; 7451.2,5270.4 7476,5270.4 ; 7451.2,5271.2 7537.6,5271.2 ; 7451.2,5272 7537.6,5272 ; 7451.2,5272.8 7536.8,5272.8 ; 7451.2,5273.6 7536.8,5273.6 ; 7451.2,5274.4 7536,5274.4 ; 7451.2,5275.2 7536,5275.2 ; 7451.2,5276 7535.2,5276 ; 7451.2,5276.8 7534.4,5276.8 ; 7451.2,5277.6 7534.4,5277.6 ; 7451.2,5278.4 7533.6,5278.4 ; 7451.2,5279.2 7532.8,5279.2 ; 7451.2,5280 7532,5280 ; 7451.2,5280.8 7531.2,5280.8 ; 7451.2,5281.6 7530.4,5281.6 ; 7451.2,5282.4 7529.6,5282.4 ; 7451.2,5283.2 7528.8,5283.2 ; 7451.2,5284 7528,5284 ; 7451.2,5284.8 7527.2,5284.8 ; 7451.2,5285.6 7525.6,5285.6 ; 7451.2,5286.4 7524.8,5286.4 ; 7451.2,5287.2 7523.2,5287.2 ; 7451.2,5288 7521.6,5288 ; 7451.2,5288.8 7519.2,5288.8 ; 7451.2,5289.6 7516.8,5289.6 ; 7451.2,5290.4 7511.2,5290.4 ; 7451.2,5440.8 7466.4,5440.8 ; 7451.2,5441.6 7466.4,5441.6 ; 7451.2,5442.4 7466.4,5442.4 ; 7452,5291.2 7491.2,5291.2 ; 7452,5443.2 7467.2,5443.2 ; 7452,5444 7467.2,5444 ; 7452,5444.8 7467.2,5444.8 ; 7452,5553.6 7471.2,5553.6 ; 7452.8,5445.6 7468,5445.6 ; 7452.8,5446.4 7468,5446.4 ; 7452.8,5552.8 7472,5552.8 ; 7453.6,5447.2 7468,5447.2 ; 7453.6,5448 7468.8,5448 ; 7453.6,5448.8 7468.8,5448.8 ; 7453.6,5552 7472,5552 ; 7454.4,5449.6 7468.8,5449.6 ; 7454.4,5450.4 7469.6,5450.4 ; 7454.4,5451.2 7469.6,5451.2 ; 7454.4,5551.2 7472.8,5551.2 ; 7455.2,5452 7469.6,5452 ; 7455.2,5452.8 7470.4,5452.8 ; 7455.2,5453.6 7470.4,5453.6 ; 7455.2,5550.4 7472.8,5550.4 ; 7456,5454.4 7470.4,5454.4 ; 7456,5455.2 7471.2,5455.2 ; 7456,5456 7471.2,5456 ; 7456,5456.8 7471.2,5456.8 ; 7456,5549.6 7473.6,5549.6 ; 7456.8,5457.6 7471.2,5457.6 ; 7456.8,5458.4 7472,5458.4 ; 7456.8,5459.2 7472,5459.2 ; 7456.8,5548.8 7473.6,5548.8 ; 7457.6,5460 7472,5460 ; 7457.6,5460.8 7472.8,5460.8 ; 7457.6,5461.6 7472.8,5461.6 ; 7457.6,5548 7474.4,5548 ; 7458.4,5462.4 7472.8,5462.4 ; 7458.4,5463.2 7472.8,5463.2 ; 7458.4,5464 7473.6,5464 ; 7458.4,5464.8 7473.6,5464.8 ; 7458.4,5546.4 7475.2,5546.4 ; 7458.4,5547.2 7474.4,5547.2 ; 7459.2,5465.6 7473.6,5465.6 ; 7459.2,5466.4 7474.4,5466.4 ; 7459.2,5467.2 7474.4,5467.2 ; 7459.2,5545.6 7475.2,5545.6 ; 7460,5468 7474.4,5468 ; 7460,5468.8 7474.4,5468.8 ; 7460,5469.6 7475.2,5469.6 ; 7460,5470.4 7475.2,5470.4 ; 7460,5544 7476,5544 ; 7460,5544.8 7476,5544.8 ; 7460.8,5471.2 7475.2,5471.2 ; 7460.8,5472 7475.2,5472 ; 7460.8,5472.8 7475.2,5472.8 ; 7460.8,5473.6 7476,5473.6 ; 7460.8,5542.4 7476.8,5542.4 ; 7460.8,5543.2 7476,5543.2 ; 7461.6,5474.4 7476,5474.4 ; 7461.6,5475.2 7476,5475.2 ; 7461.6,5476 7476,5476 ; 7461.6,5476.8 7476.8,5476.8 ; 7461.6,5540.8 7476.8,5540.8 ; 7461.6,5541.6 7476.8,5541.6 ; 7462.4,5477.6 7476.8,5477.6 ; 7462.4,5478.4 7476.8,5478.4 ; 7462.4,5479.2 7476.8,5479.2 ; 7462.4,5480 7476.8,5480 ; 7462.4,5539.2 7477.6,5539.2 ; 7462.4,5540 7477.6,5540 ; 7463.2,5480.8 7477.6,5480.8 ; 7463.2,5481.6 7477.6,5481.6 ; 7463.2,5482.4 7477.6,5482.4 ; 7463.2,5483.2 7477.6,5483.2 ; 7463.2,5484 7477.6,5484 ; 7463.2,5536.8 7478.4,5536.8 ; 7463.2,5537.6 7478.4,5537.6 ; 7463.2,5538.4 7477.6,5538.4 ; 7464,5484.8 7478.4,5484.8 ; 7464,5485.6 7478.4,5485.6 ; 7464,5486.4 7478.4,5486.4 ; 7464,5487.2 7478.4,5487.2 ; 7464,5488 7478.4,5488 ; 7464,5488.8 7478.4,5488.8 ; 7464,5534.4 7479.2,5534.4 ; 7464,5535.2 7478.4,5535.2 ; 7464,5536 7478.4,5536 ; 7464.8,5489.6 7479.2,5489.6 ; 7464.8,5490.4 7479.2,5490.4 ; 7464.8,5491.2 7479.2,5491.2 ; 7464.8,5492 7479.2,5492 ; 7464.8,5492.8 7479.2,5492.8 ; 7464.8,5493.6 7479.2,5493.6 ; 7464.8,5530.4 7480,5530.4 ; 7464.8,5531.2 7479.2,5531.2 ; 7464.8,5532 7479.2,5532 ; 7464.8,5532.8 7479.2,5532.8 ; 7464.8,5533.6 7479.2,5533.6 ; 7465.6,5494.4 7479.2,5494.4 ; 7465.6,5495.2 7480,5495.2 ; 7465.6,5496 7480,5496 ; 7465.6,5496.8 7480,5496.8 ; 7465.6,5497.6 7480,5497.6 ; 7465.6,5498.4 7480,5498.4 ; 7465.6,5499.2 7480,5499.2 ; 7465.6,5500 7480,5500 ; 7465.6,5526.4 7480,5526.4 ; 7465.6,5527.2 7480,5527.2 ; 7465.6,5528 7480,5528 ; 7465.6,5528.8 7480,5528.8 ; 7465.6,5529.6 7480,5529.6 ; 7466.4,5500.8 7480,5500.8 ; 7466.4,5501.6 7480,5501.6 ; 7466.4,5502.4 7480.8,5502.4 ; 7466.4,5503.2 7480.8,5503.2 ; 7466.4,5504 7480.8,5504 ; 7466.4,5504.8 7480.8,5504.8 ; 7466.4,5505.6 7480.8,5505.6 ; 7466.4,5506.4 7480.8,5506.4 ; 7466.4,5507.2 7480.8,5507.2 ; 7466.4,5508 7480.8,5508 ; 7466.4,5508.8 7480.8,5508.8 ; 7466.4,5509.6 7480.8,5509.6 ; 7466.4,5510.4 7480.8,5510.4 ; 7466.4,5511.2 7480.8,5511.2 ; 7466.4,5512 7480.8,5512 ; 7466.4,5512.8 7480.8,5512.8 ; 7466.4,5513.6 7480.8,5513.6 ; 7466.4,5514.4 7480.8,5514.4 ; 7466.4,5515.2 7480.8,5515.2 ; 7466.4,5516 7480.8,5516 ; 7466.4,5516.8 7480.8,5516.8 ; 7466.4,5517.6 7480.8,5517.6 ; 7466.4,5518.4 7480.8,5518.4 ; 7466.4,5519.2 7480.8,5519.2 ; 7466.4,5520 7480.8,5520 ; 7466.4,5520.8 7480.8,5520.8 ; 7466.4,5521.6 7480.8,5521.6 ; 7466.4,5522.4 7480.8,5522.4 ; 7466.4,5523.2 7480.8,5523.2 ; 7466.4,5524 7480.8,5524 ; 7466.4,5524.8 7480.8,5524.8 ; 7466.4,5525.6 7480,5525.6 ; 7497.6,5239.2 7537.6,5239.2 ; 7500.8,5270.4 7537.6,5270.4 ; 7503.2,5240 7537.6,5240 ; 7504.8,5269.6 7538.4,5269.6 ; 7506.4,5240.8 7538.4,5240.8 ; 7507.2,5268.8 7538.4,5268.8 ; 7508,5241.6 7538.4,5241.6 ; 7508.8,5242.4 7538.4,5242.4 ; 7508.8,5268 7538.4,5268 ; 7509.6,5267.2 7539.2,5267.2 ; 7510.4,5243.2 7539.2,5243.2 ; 7510.4,5266.4 7539.2,5266.4 ; 7511.2,5244 7539.2,5244 ; 7511.2,5265.6 7539.2,5265.6 ; 7512,5244.8 7539.2,5244.8 ; 7512,5264.8 7539.2,5264.8 ; 7512.8,5245.6 7539.2,5245.6 ; 7512.8,5246.4 7540,5246.4 ; 7512.8,5264 7540,5264 ; 7513.6,5247.2 7540,5247.2 ; 7513.6,5262.4 7540,5262.4 ; 7513.6,5263.2 7540,5263.2 ; 7514.4,5248 7540,5248 ; 7514.4,5248.8 7540,5248.8 ; 7514.4,5249.6 7540,5249.6 ; 7514.4,5260.8 7540,5260.8 ; 7514.4,5261.6 7540,5261.6 ; 7515.2,5250.4 7540,5250.4 ; 7515.2,5251.2 7540,5251.2 ; 7515.2,5252 7540,5252 ; 7515.2,5252.8 7540,5252.8 ; 7515.2,5257.6 7540,5257.6 ; 7515.2,5258.4 7540,5258.4 ; 7515.2,5259.2 7540,5259.2 ; 7515.2,5260 7540,5260 ; 7516,5253.6 7540,5253.6 ; 7516,5254.4 7540,5254.4 ; 7516,5255.2 7540,5255.2 ; 7516,5256 7540,5256 ; 7516,5256.8 7540,5256.8
  Top Layer w10: 6888.3,1910.86 6955.44,1978 7111,1978 7225,2092 7324,2191 7443,2310 7443,2736 7547,2840 7547,3032 7547,3394 7520,3421 7429,3421 7409,3401 7329.13,3401 ; 7113.3,2422.86 7113.3,2463.7 7044,2533 7044,2573 7066,2595 7178,2595 7204,2621 v1@7204,2695 ; 7288.3,1910.86 7350.44,1973 7424,1973 7537,2086 7537,2785 7567,2815 7567,3422 7538,3451 7329.13,3451 ; 4195,1335 4200,1335 9215,1335 9215,6050 4195,6050 4195,1335
  Top Layer w15: 5953.3,3017.86 5943.3,3027.86 5943.3,3237.86 6011.3,3305.86 6205.3,3305.86 6241.3,3341.86 6241.3,3474.86 6195.3,3520.86 6195.3,3709.3 6437,3951 6437,4818 6499,4880 6840.36,4880 6971.75,4748.6 ; v3(5959.3,4777.86) 5977.3,4795.86 ; v3(5964.25,2210.41) v3@5969.3,2215.46 ; 5966.3,2284.26 5966.3,2566.3 6045.86,2645.86 6220.86,2645.86 6249.3,2674.3 6249.3,2835.86 6225.3,2859.86 6063.3,2859.86 6001.3,2921.86 6001.3,2975.86 6001.3,3019.86 6001.3,3223.86 6047.3,3269.86 6220.3,3269.86 6273.3,3322.86 6273.3,3488.86 6226.3,3535.86 6226.3,3682.3 6475,3931 6475,4432 6530,4487 6788.1,4487 6838.13,4537.03 ; 5968.3,3588.26 5968.3,3835.86 6033.3,3900.86 6167.3,3900.86 6346,4079.56 6346,4804 6462,4920 6844.9,4920 6994.03,4770.87 ; 6725.22,4112.85 6717,4121.07 6717,4371.36 6860.4,4514.75 ; 6791.22,4111.85 6758,4145.07 6758,4367.81 6882.67,4492.48 ; v1@6818,2893 6818,2322 6924,2216 7083,2216 7163.3,2296.3 7163.3,2466.7 v4@7082.5,2547.5 ; v1(6913,2903) 6915,2901 6970.87,2901 ; 6963.3,2322.86 6963.3,2686.3 7018,2741 v4(7149,2741) v4@7150,2742 ; 6970.87,2951 6892,2951 6860,2919 6860,2340 6943,2257 7038,2257 7063.3,2282.3 7063.3,2322.86 7065,2324.56 7065,2467 7017,2515 7017,2607 7042,2632 v4(7078,2632) ; v4(7076,2780) 7247,2951 7329.13,2951 ; v4(7077,2705) 7162,2705 7196,2739 7196,2836 7261,2901 7329.13,2901 ; v1(7230,2776) 7233,2773 v1(7233,2561)
  Top Layer w20: 5943.3,2940.46 5943.3,2882.36 v3(5966.25,2859.41) ; 6033,5438 6244,5438 6625,5057 7090,5057 7209,4938 7209,4818.81 7116.52,4726.33 ; 6036.7,4774.86 6036.7,4847.3 5988,4896 5988,4962 6039,5013 7063,5013 7167,4909 7167,4821.36 7094.25,4748.6 ; 6038,4165 6043,4170 6163,4170 6303,4310 6303,4846 6426,4969 7039,4969 7122,4886 7122,4820.9 7071.97,4770.87 ; v3(6311.25,3939.41) v3@6311.25,3948.81 ; v1(6501,4833) 6842.81,4833 6949.48,4726.33 7025.27,4650.54 7025.27,4606 ; 6643,4575 6726,4575 6783,4632 6821.1,4632 6838.13,4614.97 ; 6643,4775 6722.64,4775 6860.4,4637.25 ; v1@6774,3424 6775,3425 6883,3425 6909,3451 6970.87,3451 ; v1(6795,4319) 6795,4360.27 6904.94,4470.21 ; v1(6832,4282) 6832,4308.19 6949.48,4425.67 ; 6861.14,4067.9 6861.14,3704.86 7061,3505 7061,3271 7041,3251 6970.87,3251 ; 6861.14,4142.7 6861.14,4248.24 6994.03,4381.13 ; v1(6863.3,4387.86) 6867.13,4387.86 6927.21,4447.94 ; 6875,3499 6968.87,3499 6970.87,3501 ; v1@6875.68,4307.32 6971.75,4403.4 ; 6882.67,4659.52 6823.59,4718.59 6823.59,4719.59 6867.64,4763.64 6883.27,4748 6927.21,4704.06 ; 6904.94,4681.79 6980.73,4606 7025.27,4606 ; v1(6922,4262) 6922,3688 7096,3514 7096,3234 7063,3201 6970.87,3201 ; 6970.87,2851 7048,2851 v1(7088,2891) ; 6970.87,3001 7052,3001 v1(7088,2965) ; 6970.87,3051 7121,3051 7198,3128 7198,3543 7035,3706 v1@7035,4056 ; 6970.87,3101 7106,3101 7163,3158 7163,3536 6998,3701 v1@6998,4112 ; 6970.87,3151 7086,3151 7129,3194 7129,3528 6961,3696 6961,4173 7088,4300 7088,4365.1 7071.97,4381.13 ; v1(7052.3,4471.86) 7052.3,4445.34 7094.25,4403.4 ; 7116.52,4425.67 7454,4088.19 7454,3942 7545,3851 7654,3851 ; 7138.79,4704.06 7139.06,4704.06 v1(7182,4747) ; 7161.06,4681.79 7466,4986.73 7466,5069 7656,5259 ; 7183.33,4492.48 7608.81,4067 7661,4067 ; 7183.33,4659.52 7575.81,5052 7663,5052 ; 7205.6,4514.75 7469.36,4251 7654,4251 ; 7205.6,4637.25 7419.36,4851 7654,4851 ; 7227.87,4537.03 7313.9,4451 7654,4451 ; 7227.87,4614.97 7263.9,4651 7654,4651 ; 7240,3351 7329.13,3351 ; 7241,3101 7329.13,3101 ; 7291,4073 7351,4073 7403,4021 7403,3904 7599,3708 7904,3708 7963,3767 ; 7329.13,3051 7240,3051 7240,3501 7329.13,3501 ; 7329.13,3151 7329.13,3201 ; 7329.13,3251 7449,3251 7479,3221 7479,3165 ; 7329.13,3301 7448,3301 7478,3331 7478,3364 7479,3365 ; 7860,3949 7561,3949 7506,4004 7506,4125.27 7161.06,4470.21 7025.27,4606
  Top Layer w30: 6681.19,5761.23 cw(c6738.97,5761.23) 6738.97,5819 7213,5819 cw(c7213,5750) 7282,5750 7282,5615 ; 6683.74,5760.02 6684,5748 ; 7184,3998.6 7188.34,3994.26 7291,3994.26 ; 7184,4073.4 7290.6,4073.4 7291,4073 ; v1(7210,3076) 7231,3076
  Top Layer w40: 6368.44,3268.2 6369.3,3267.34 6369.3,3085.86 ; 6435.3,3268.13 6435.37,3268.2 ; 6502.3,3076.86 6502.3,3268.2 ; 6569.23,3268.2 6569.3,3268.13 ; v1(6669,4293) v1(6669,4431) ; 6706.3,1802.86 6706.3,2410.86 ; 6740,3757 6753,3757 6775,3735 6775,3499
  Top Layer w50: 6325.3,2498.86 v3@6399.3,2498.86
  Top Layer w60: 6651.3,3267.2 6718.96,3267.2 6746,3240.16 v4(6746,2602)
  Top Layer w70: 5354.3,1960.86 5364.3,1970.86 ; 5361.3,2164.86 5367.3,2170.86 ; 5616.83,1866.33 5628.67,1866.33 ; 6643.3,2797.86 6643.3,2542.86 6705.3,2480.86 6705.3,2072.03 6705.15,2071.88
  Top Layer w80: 5361.3,2782.86 5364.3,2779.86 ; 5361.3,2982.86 5366.21,2987.77 ; 5361.3,3818.86 5365.83,3814.33 ; 5361.3,4636.86 5391.3,4666.86 ; 5364.3,3409.86 5372.61,3401.55